# Altium PCB nRF52_UWB_MPU92_MTi_JLC.pcbdoc
Units mil, origin at the board's own origin, x right, y up, seen from the top; angles counter-clockwise.
Board outline 3419.96 x 2480 mil, 2 copper layers (Top Layer, Bottom Layer); 28 components, 34 nets, 176 pads, 73 vias.
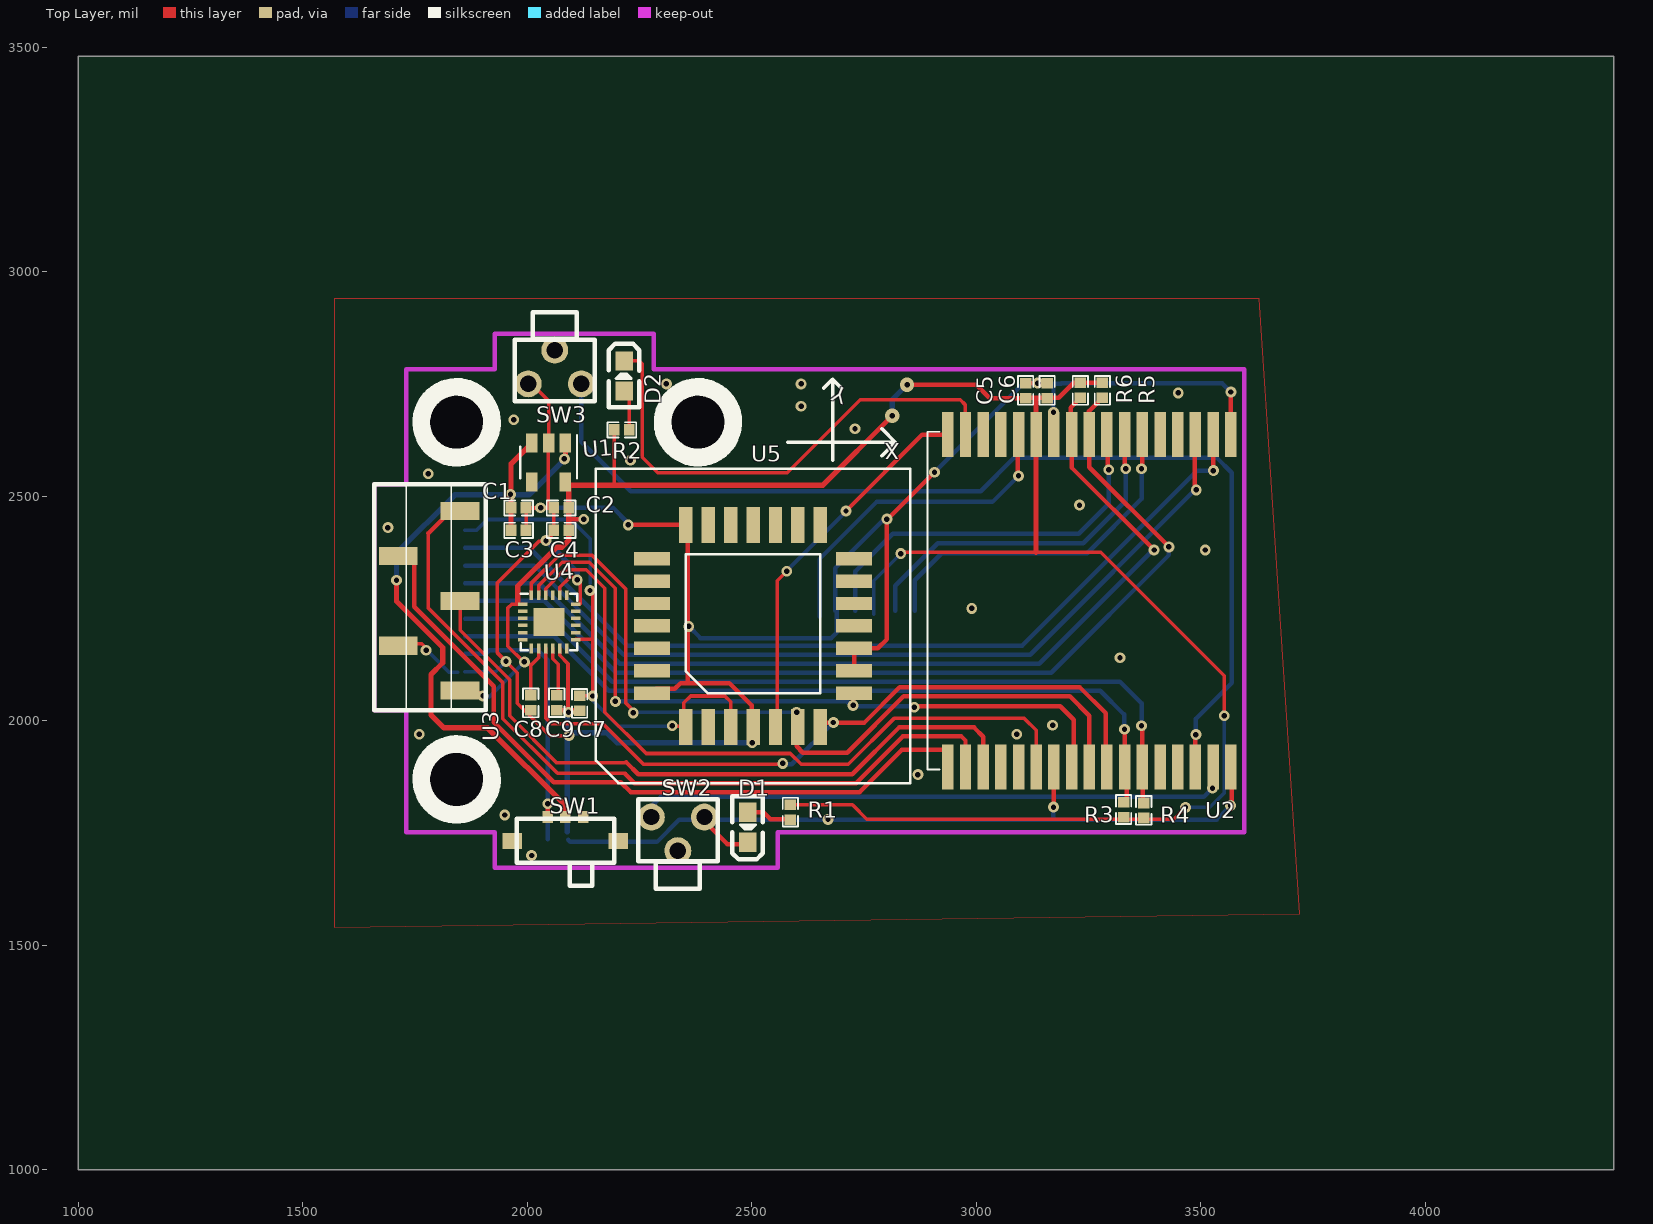
[diagram p0: Top Layer view]
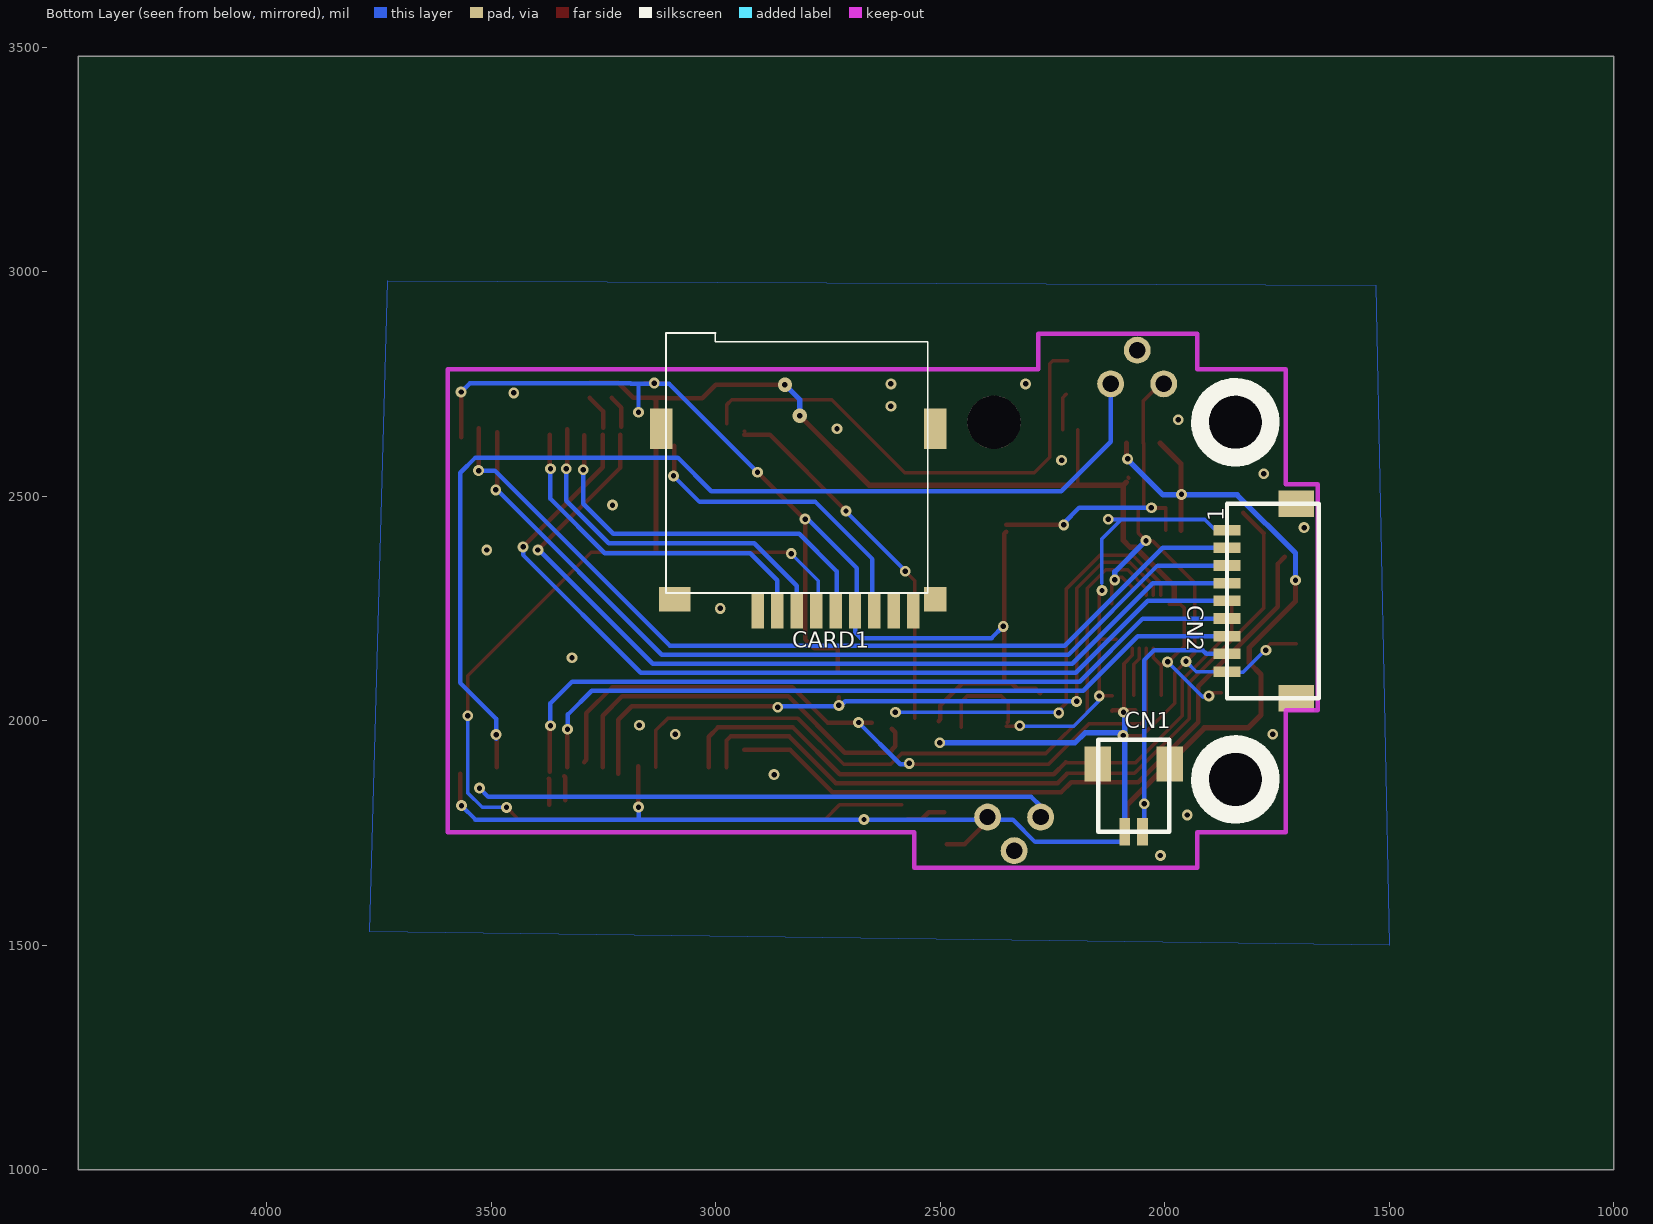
[diagram p1: Bottom Layer view, seen from below]

## Layer stack, top to bottom
Top Layer: signal copper (thickness not stored)
Dielectric: dielectric 12.6, FR-4, Dk 4.8
Bottom Layer: signal copper (thickness not stored)

## Board outline
4419.96,1000 1000,1000 1000,3480 4419.96,3480

## Components (designator, comment, footprint, x,y, rotation, side; value= is the part's Value field where it differs from the comment)
C1 "10uF" 0402 1980.82,2473.64 r180 top
C2 "10uF" 0402 2075.82,2473.64 r0 top
C3 "100nF" 0402 1980.82,2423.64 r180 top
C4 "100nF" 0402 2075.82,2423.64 r0 top
C5 "10uF" 0402 3110,2735 r270 top
C6 "100nF" 0402 3158,2735 r270 top
C7 "10nF" 0402 2117,2039 r90 top
C8 "100nF" 0402 2008,2040 r90 top
C9 "100nF" 0402 2066,2040 r270 top
CARD1 "HYC77-TF09-200" TF-015 2815.87,2447.6 r180 bottom
CN1 "A1002WV-S-2P" A1002WR-S-2P_LEO 2069.4,1828.7 r180 bottom
CN2 "A1002WR-S-9P" A1002WR-S-9P_LEO 1785.94,2266.89 r270 bottom
D1 "YELLOW" LED-0603 2490.82,1762.64 r90 top
D2 "RED" LED-0603 2215.82,2767.64 r270 top
R1 "1K" 0402 2586,1796 r270 top
R2 "200" 0402 2210.82,2647.64 r180 top
R3 "10K" 0402 3328,1802 r270 top
R4 "10K" 0402 3373,1800 r270 top
R5 "10K" 0402 3281,2735.6 r90 top
R6 "10K" 0402 3232,2735.6 r90 top
SW1 "SSAJ120100" SW-SMD-5.5X2.5 2085.15,1759.02 r0 top
SW2 "KAN4562-0501C" KAN4562-0501C 2335.5,1748 r0 top
SW3 "KAN4562-0501C" KAN4562-0501C 2061.5,2787.6 r180 top
U1 "SPX3819M5-L-3-3/TR" SOT-23-5 2048,2575 r270 top
U2 "DWM1001" DWM1001 3404.06,2266.89 r270 top
U3 "GPS_Header" GPS_HEADER_SMT 1730.83,1751.14 r90 top
U4 "MPU-9250" QFN-24-1EP_3X3MM_PITCH0.4MM 2049,2220 r0 top
U5 "MTi-1" PLCC-28 2503,2211 r0 top

## Footprints (in the part's own frame and the unit in brackets; to place one, negate y for a bottom-side part, rotate by r counter-clockwise, add the part's x,y. Pads: shape width x height; smd on the part's side, far side on the other; paste and mask are expansions set on the pad)
0402 [mm]
  rect 0.6x0.65 smd: 1(-0.424,0) 2(0.424,0)
  silkscreen extent -0.82,-0.43 0.81,0.43
A1002WR-S-2P_LEO [mm]
  rect 0.6x1.55 smd: 1(-0.502,-1.925) 2(0.498,-1.925)
  rect 1.5x2 smd: 3(-2.033,1.906) 4(2.031,1.906)
  silkscreen extent -2,-1.92 2,3.27
A1002WR-S-9P_LEO [mm]
  rect 0.6x1.55 smd: 1(-4.001,-1.923) 2(-3,-1.923) 3(-1.997,-1.926) 4(-1.001,-1.923) 5(0,-1.923) 6(1.001,-1.923) 7(1.999,-1.923) 8(3.001,-1.923) 9(4,-1.923)
  rect 1.5x2 smd: 10(-5.499,2) 11(5.5,2)
  silkscreen extent -5.5,-1.92 5.5,3.28
DWM1001 [mm]
  rect 2.54x0.65 smd: 1(-9.403,4.129) 2(-9.403,3.129) 3(-9.403,2.129) 4(-9.403,1.128) 5(-9.403,0.13) 6(-9.403,-0.871) 7(-9.403,-1.872) 8(-9.403,-2.87) 9(-9.403,-3.871) 10(-9.403,-4.872) 11(-9.403,-5.871) 12(-9.403,-6.871) 13(-9.403,-7.871) 14(-9.403,-8.872) 15(-9.403,-9.87) 16(-9.403,-10.871) 17(-9.403,-11.872) 18(9.406,-11.872) 19(9.406,-10.871) 20(9.406,-9.87) 21(9.406,-8.872) 22(9.406,-7.871) 23(9.406,-6.871) 24(9.406,-5.871) 25(9.406,-4.872) 26(9.406,-3.871) 27(9.406,-2.87) 28(9.406,-1.872) 29(9.406,-0.871) 30(9.406,0.13) 31(9.406,1.128) 32(9.406,2.129) 33(9.406,3.129) 34(9.406,4.129)
  silkscreen extent -9.56,-13.02 9.54,-12.32
GPS_HEADER_SMT [mm]
  rect 1.02x2.2 smd: 1(8.02,-3.051) 2(10.56,0.45) 3(13.1,-3.051) 4(15.64,0.45) 5(18.18,-3.051)
  round 3 hole 3 slot 3 at 90 deg unplated: ""(3,-2.85) ""(23.2,-2.85)
  silkscreen extent 1,-4.85 25.2,1.8
KAN4562-0501C [mil]
  round 60 hole 36: 0(0,-37.4) 1(-59.05,37.4) 2(59.06,37.4)
  silkscreen extent -89,-122 89,77
LED-0603 [mil]
  rect 43x39 smd: 1(33.5,0) 2(-33.5,0)
  silkscreen extent -72,-34 70,34
PLCC-28 [mil]
  rect 80x30 smd: 1(-225,0) 2(-225,-50) 3(-225,-100) 4(-225,-150) 12(225,-150) 13(225,-100) 14(225,-50) 15(225,0) 16(225,50) 17(225,100) 18(225,150) 26(-225,150) 27(-225,100) 28(-225,50)
  rect 30x80 smd: 5(-150,-225) 6(-100,-225) 7(-50,-225) 8(0,-225) 9(50,-225) 10(100,-225) 11(150,-225) 19(150,225) 20(100,225) 21(50,225) 22(0,225) 23(-50,225) 24(-100,225) 25(-150,225)
  silkscreen extent -350,-350 350,350
QFN-24-1EP_3X3MM_PITCH0.4MM [mil]
  rect 21.65x7.87 smd: 1(-59.05,39.37) 2(-59.05,23.62) 3(-59.05,7.87) 4(-59.05,-7.88) 5(-59.05,-23.63) 6(-59.05,-39.38) 13(59.05,-39.38) 14(59.05,-23.63) 15(59.05,-7.88) 16(59.05,7.87) 17(59.05,23.62) 18(59.05,39.37)
  rect 7.87x21.65 smd: 7(-39.35,-59.08) 8(-23.6,-59.08) 9(-7.9,-59.08) 10(7.9,-59.08) 11(23.6,-59.08) 12(39.4,-59.08) 19(39.4,59.08) 20(23.6,59.08) 21(7.9,59.08) 22(-7.9,59.08) 23(-23.6,59.08) 24(-39.35,59.08)
  rect 34.45x31.5 smd: 25(-17.1,-15.78) 25(-17.1,15.72) 25(17.15,-15.78) 25(17.15,15.72)
  silkscreen extent -63,-63 63,63
SOT-23-5 [mm]
  rect 1.06x0.65 smd: 1(-1.1,0.95) 2(-1.1,0) 3(-1.1,-0.95) 4(1.1,-0.95) 5(1.1,0.95)
  silkscreen extent -1.55,-1.61 0.9,1.61
SW-SMD-5.5X2.5 [mil]
  rect 23.62x27.56 smd: 1(-39.4,26.57) 2(39.4,26.57) C(0,26.57)
  rect 43.31x35.43 smd: 4(-118.15,-26.58) 5(118.15,-26.58)
  silkscreen extent -108,-127 108,23
TF-015 [mil]
  rect 27.56x78.74 smd: 1(-90.2,-202.58) 2(-46.95,-202.48) 3(-3.75,-202.58) 4(39.5,-202.58) 5(82.8,-202.58) 6(126,-202.58) 7(169.2,-202.58) 8(212.4,-202.58) 9(255.9,-202.58)
  rect 50x55 smd: 10(305,-177.43)
  rect 50x90 smd: 11(305,202.57) 12(-305,202.57)
  rect 70x55 smd: 13(-275,-177.43)
  silkscreen extent -295,-163 288,416

## Free pads (board coordinates)
  round 118.11 hole 118.1 slot 118.11 at 0 deg unplated: ""(2380.43,2664.53)

## Via types
v1: diameter 24.02, hole 12.01, Top Layer to Bottom Layer, 71 vias
v2: diameter 31.5, hole 12.01, Top Layer to Bottom Layer, 2 vias

## Nets (pads, with @x,y where several pads share a name; then routed paths per layer and width w, separated by ;. In a path a pad name is that pad's centre, name@x,y a point inside that pad or via, vN(x,y) a via of type N, cw(c..) or ccw(c..) an arc to the next point about the centre after c; other vN are vias at no path point)
BUTTON_RST: SW2.1 U2.33 | length 1290.4
  Bottom Layer w10: SW2.1@2276.49,1785.4 2276.49,1809.49 2298,1831 3507,1831 v1(3526,1850)
BUTTON_SDCARD: SW3.1 U2.32 | length 2366
  Top Layer w10: U2.32 3487.86,1967.86 v1(3489,1969)
  Bottom Layer w10: SW3.1 2120.58,2621.42 2231,2511 3010,2511 3084.88,2585.88 3535.13,2585.88 3569,2552 3569,2084 3489,2004 v1@3489,1960
CHARGE_VC: CN1.2 CN2.8 SW1.1 | length 625.4
  Top Layer w10: SW1.1 2045.75,1814.75 v1(2046,1815)
  Bottom Layer w10: CN2.8 1907.75,2148.75 1916,2157 2024,2157 2046,2135 CN1.2@2046,1736
D2_1: D2.1 R2.1 | length 82.5
  Top Layer w7.87: D2.1@2220,2727 2227.52,2719.48 R2.1
FOOT_2: CN2.4 R6.1 U2.10 | length 2119
  Top Layer w10: U2.10@3210,2654 3210,2696.9 R6.1 ; U2.10 3212.26,2563.74 v1(3396,2380)
  Bottom Layer w10: CN2.4 2027.13,2306.3 2206.43,2127 3140,2127 v1@3394,2381
FOOT_5: CN2.5 R5.1 U2.9 | length 2157
  Top Layer w10: U2.9@3251,2652 3251,2688.9 R5.1 ; U2.9 3251.66,2564.34 v1(3429,2387)
  Bottom Layer w10: CN2.5 2038.25,2266.9 2198.15,2107 3167,2107 3429,2369 v1@3429,2381
FOOT_6: CN2.6 R4.1 U2.29 | length 1802.7
  Top Layer w10: v1(3368,1989) 3370,1987 U2.29@3370,1886 ; R4.1@3371,1813 3371,1870 U2.29@3372,1871
  Bottom Layer w10: CN2.6 2049.36,2227.5 2189.86,2087 3320,2087 3368,2039 v1@3368,1983
FOOT_7: CN2.7 R3.1 U2.28 | length 1713.9
  Top Layer w10: v1(3330,1981) 3330.36,1980.64 U2.28 ; R3.1@3335,1823 3335,1874 U2.28@3337,1876
  Bottom Layer w10: CN2.7 2060.38,2188.2 2181.58,2067 3276,2067 3329,2014 v1@3329,1978
GND: C1.1 C2.1 C3.1 C4.1 C5.1 C6.1 C7.1 C8.1 C9.2 CARD1.6 CN1.1 CN2.9 D1.2 SW2.2 SW3.2 U1.2 U2.1 U2.11 U2.24 U2.34 U3.2 U4.11 U4.18 U4.20 U5.4 U5.8 U5.13 U5.14 U5.25 | length 7374.9
  Top Layer w7.87: U3.2@1707,2171 1765,2171 v1@1780,2156 ; C3.1 C1.1 C2.1 C4.1@2059.12,2431 ; SW3.2@2012,2748 2048,2712 U1.2 2047,2617.3 2047,2475 ; C4.1@2059,2431 2059,2418 2041,2400 2027,2400 1933,2306 1933,2152 1978,2107 1978,2039 2050,1967 v1(2093,1967) ; U4.11 2072.6,2145.4 2091,2127 v1@2091,2019 ; U4.20@2073,2289 2073,2297 2095,2319 2111,2319 2118,2312 U4.18@2118,2261 ; v1@2225,2437 v1@2226,2436
  Top Layer w10: C9.2 2116,2023.3 C7.1 ; v1@2225.98,2435.98 U5.25 ; U5.4 2288,2071 2329,2071 2341.78,2083.78 2450.22,2083.78 2500,2034 2500,2003 U5.8@2504,1999 ; U5.25@2353,2421 2358,2416 2358,2083.78 ; SW2.2@2402,1769 2446,1725 D1.2@2486,1725 ; U5.13 U5.14 2781,2161 2801,2181 2801,2447 v1(2907,2553) ; C5.1 C6.1 ; v1@3172,1811 3173,1812 U2.24@3173,1899 ; v1(3566,1811) 3569,1814 U2.34@3569,1882 ; U2.1@3567,2631 v1(3567,2732)
  Bottom Layer w7.87: v1@1772,2162 1826,2108 CN2.9@1845,2108 ; CN2.9 1930.4,2109.4 v1(1953,2132) ; v1@2091,2015 v1@2092,2016
  Bottom Layer w10: v1(2030,2474) 2191,2474 2225,2440 v1@2225,2437 ; CN1.1@2091,1735 2096,1730 2289,1730 2339,1780 3535,1780 v1(3566,1811) ; v1(2360,2210) 2385.91,2184.09 2677.09,2184.09 2689.87,2196.87 CARD1.6 ; CARD1.6@2686,2245.02 2686,2340 v1@2798,2452 ; v1(2907,2553) 3104,2750 3189,2750 ; 3171,1785.4 v1@3171,1807 ; v1(3172,2687) 3172,2750 ; 3189,2751.7 3547.3,2751.7 v1@3569,2730
  Bottom Layer w11.81: v1(2042,2401) 2111.41,2331.58 v1(2111.41,2313.54) ; CN1.1 2089.18,2013.18 v1@2091,2015 ; v1@2089.18,1973 2178,1973 2200,1951 v1(2501,1951)
  other v1: 2010,1700 2670,1780 1950,1790 3172.04,1807.63 2870,1880 1760,1970 3090,1970 3170,1990 2092,2019 3320,2140 1775,2157 2990,2250 3510,2380 1690,2430 2225,2436 2801,2449 3230,2480 1780,2550 2230,2580 2730,2650 1970,2670 2610,2700 3450,2730 2310,2750 2610,2750 3137,2751.7
GPS_1PPS: U2.19 U3.5 | length 1741.6
  Top Layer w7.87: 1780,2417.01 1780,2251 1945.8,2085.2 1945.8,2004.7 2067.7,1882.8 2218,1882.8
  Top Layer w10: 1780,2417 U3.5@1826,2463 ; 2218,1882 2238.92,1861.08 2732.36,1861.08 2836.28,1965 2967,1965 2976.06,1955.94 U2.19
GPS_UART_RX: U2.18 U3.4 | length 1561.7
  Top Layer w10: U3.4@1733,2365 1749,2349 1749,2254 1926,2077 1926,1996.5 2059.5,1863 2208.72,1863 2230.64,1841.08 2740.65,1841.08 2834.57,1935 U2.18@2936,1935
GPS_UART_TX: U2.20 U3.3 | length 1528.6
  Top Layer w7.87: U3.3 1850.94,2201.56 1961,2091.5 1961,2011 2066,1906 2220.18,1906
  Top Layer w10: 2221.23,1907.05 2247.2,1881.08 2724.08,1881.08 2828,1985 2995,1985 3015.46,1964.54 U2.20
LED_R: D2.2 U2.16 | length 1099.3
  Top Layer w7.87: D2.2 2249.86,2801.14 2256,2795 2256,2587 2291,2552 2579,2552 2742,2715 2964,2715 2975,2704 U2.16@2975,2661
R1_2: D1.1 R1.2 | length 92.3
  Top Layer w10: D1.1 2525.86,1796.14 2541,1781 2574,1781 R1.2@2576,1779
S$149: 
S$151: 
S$153: 
S$155: 
S$157: 
S$159: 
SDCARD_CLK: CARD1.5 U2.8 | length 867.9
  Top Layer w10: U2.8@3293,2636 3293,2561 v1(3295,2559)
  Bottom Layer w10: CARD1.5@2731,2245.02 2731,2333 2814,2416 3228,2416 3295,2483 v1(3295,2559)
SDCARD_MISO: CARD1.7 U2.13 | length 713.9
  Top Layer w10: v1@3092.16,2545.84 U2.13@3092.16,2612.09
  Bottom Layer w10: CARD1.7@2651,2232 2651,2360 2778,2487 3036,2487 v1(3094,2545)
SDCARD_MOSI: CARD1.3 U2.7 | length 807.3
  Top Layer w10: U2.7@3331,2649 3331,2563 v1(3333,2561)
  Bottom Layer w10: CARD1.3 2819.61,2300.61 2914,2395 3238,2395 3333,2490 v1(3333,2561)
SDCARD_NCS: CARD1.2 U2.6 | length 791.8
  Top Layer w10: v1(3368,2561) 3369.76,2562.76 U2.6
  Bottom Layer w10: CARD1.2 2862.81,2312.81 2923.08,2373.08 3247.08,2373.08 3368,2494 v1(3368,2561)
SPI_CLK: U2.25 U4.23 U5.12 | length 1667.7
  Top Layer w7.87: U4.23 2025.4,2300.4 2078,2353 2138,2353 2196,2295 v1@2196,2043.23
  Top Layer w10: v1(2725.83,2034) U5.12@2725.83,2052.64 ; v1@2860,2032 3187,2032 3217,2002 U2.25@3217,1882
  Bottom Layer w10: v1(2196.45,2043.07) 2711.93,2043.07 2723,2032 v1@2862,2032
  other v1: 2862,2030
SPI_MISO: U2.27 U4.9 U5.11 | length 1680.7
  Top Layer w7.87: U4.9 2041.1,2005.9 2054,1993 2169,1993 2259,1903 v1@2569,1903
  Top Layer w10: U5.11@2653,1996 2751,1996 2830,2075 3230,2075 3288,2017 3288,1913 U2.27@3293,1908
  Bottom Layer w10: v1(2569,1905) 2571,1903 2589,1903 v1(2682,1996)
SPI_MOSI: U2.26 U4.24 U5.10 | length 1822.8
  Top Layer w7.87: U4.24 2009.65,2306.65 2071.56,2368.56 2144.44,2368.56 2220,2293 2220,2039 v1@2232.5,2026.5
  Top Layer w10: U5.10@2608,1982 2600,1974 2600,1943 2614,1929 2712.5,1929 2838.5,2055 3208,2055 3251.66,2011.34 U2.26
  Bottom Layer w7.87: v1@2231,2025 2237,2019 v1(2600,2019)
  other v1: 2236.22,2017.48
SPI_NCS_MPU92: U2.23 U4.22 | length 1601
  Top Layer w7.87: U4.22 2041.1,2294.1 2082.98,2335.98 2132.01,2335.98 2173,2295 2173,2018.97 2265,1927.01 2361.33,1927 2586,1927 2610,1903 2715,1903 2817,2005 3107,2005 3133.56,1978.44 U2.23
SPI_NCS_MTI: U2.17 U5.9 | length 828.1
  Top Layer w7.87: U5.9@2557,2005 2557,2312 v1(2578,2333) ; U2.17@2935,2644 U2.17@2936,2644
  Top Layer w10: v1@2711,2468 2880.09,2637.09 U2.17
  Bottom Layer w10: v1@2573,2329 2710,2466 v1(2710,2467)
SWD_CLK: CN2.2 U2.2 | length 2012.2
  Top Layer w10: v1(3528,2557) U2.2@3528,2651
  Bottom Layer w10: CN2.2 2005,2385 2223,2167 3102,2167 3492,2557 v1(3528,2557)
SWD_DIO: CN2.3 U2.3 | length 1994
  Top Layer w10: U2.3@3486,2642 3486,2518 v1(3490,2514)
  Bottom Layer w10: CN2.3 2016.22,2345.5 2214.72,2147 3120,2147 v1@3490.41,2517.41
U4_10: C9.1 U4.10 | length 109.2
  Top Layer w7.87: U4.10 2056.9,2138.1 2069,2126 C9.1@2069,2056.7
VCC3.3: C2.2 C4.2 C5.2 C6.2 C7.2 C8.2 CARD1.4 CN2.1 R1.1 R2.2 R3.2 R4.2 R5.2 R6.2 U1.5 U2.12 U3.1 U4.1 U4.8 U4.13 U5.5 U5.7 | length 6088.8
  Top Layer w7.87: U3.1@1874,2062 1895.24,2062 v1(1901.97,2055.27) ; U4.1 1965.37,2259.37 1957,2251 1957,2166 v1@1992,2131 ; v1(1994,2131) 2000,2131 2008,2123 ; C8.2 2008,2123 ; U4.8 2025.4,2140.4 2008,2123 ; U1.5@2080,2540 U1.5@2082,2542 ; U4.13@2108.05,2181 2146,2181 ; C7.2 v1@2148,2055.7 ; v1@2143,2295 2146,2292 v1(2146,2055) ; 2194.12,2524.58 R2.2 ; v1@2324,1988 U5.5@2353,1988 ; U5.5@2351,1996 2349,1998 2349,2040 2364,2055 2440,2055 2453,2042 U5.7 ; R1.1 2724.3,1812.7 2756.53,1780.47 3439.47,1780.47 v1(3466,1807) ; v1@2828,2369 2834,2375 3277,2375 3552,2100 v1(3552,2011)
  Top Layer w10: 2092.52,2448.68 2092.63,2448.58 v1(2125.98,2448.58) ; v2(2845.98,2747.99) 3000,2748 3029.7,2718.3 C5.2 3110.7,2719 3184,2719 3217.3,2752.3 R5.2 ; 3133,2713 3139,2719
  Top Layer w11.81: 1979.02,2261.42 1979.02,2300.02 2065,2386 2077,2386 2092.52,2401.52 U1.5@2092.52,2524.58 ; U1.5 U1.5@2092.52,2524.58 ; v2(2812.98,2678.99) 2658.58,2524.58 U1.5@2092.52,2524.58 ; 3132.99,2375 3132.99,2712.99
  Bottom Layer w7.87: CN2.1 1887.4,2424.4 1911,2448 2097,2448 ; v1(1901.97,2055.27) 1911.73,2055.27 1915,2052 v1(1994,2131) ; v1(2125.98,2448.58) 2125.4,2448 2097,2448 ; 2141,2306 2141,2404 2097,2448 ; v1(2146,2055) 2146,2045 2203,1988 v1@2328,1988 ; CARD1.4@2772,2237 2772,2312 v1(2832,2372) ; v1(3466,1807) 3520,1807 3552,1839 v1(3552,2011)
  Bottom Layer w11.81: v2(2812.98,2678.99) 2813,2715.01 v2(2845.98,2747.99)
  other v1: 2323,1989 2140,2290
VCC3.7: C1.2 C3.2 SW1.C U1.1 U1.3 | length 1532.4
  Top Layer w11.81: v1(1709.02,2312.99) 1709,2266 1812,2163 1812,2129 1786,2103 1786,2013 1815,1984 1912,1984 2085.15,1810.85 SW1.C ; C3.2 1964.12,2571.82 U1.3 ; v1(2083,2583) 2085.4,2585.4 U1.1
  Bottom Layer w11.81: v1(1709.02,2312.99) 1709.02,2373.02 1839,2503 2004,2503 v1@2083,2582
  other v1: 1963.01,2503.99
pads on no net: CARD1.1 CARD1.8 CARD1.9 CARD1.10 CARD1.11 CARD1.12 CARD1.13 CN1.3 CN1.4 CN2.10 CN2.11 SW1.2 SW1.4 SW1.5 SW2.0 SW3.0 U1.4 U2.4 U2.5 U2.14 U2.15 U2.21 U2.22 U2.30 U2.31 U3. U4.2 U4.3 U4.4 U4.5 U4.6 U4.7 U4.12 U4.14 U4.15 U4.16 U4.17 U4.19 U4.21 U4.25 U5.1 U5.2 U5.3 U5.6 U5.15 U5.16 U5.17 U5.18 U5.19 U5.20 U5.21 U5.22 U5.23 U5.24 U5.26 U5.27 U5.28

## Polygon pours and split planes (outlines as drawn)
GND on Bottom Layer (solid): 1530,2970 1500,1500 3770,1530 3730,2980
GND on Top Layer (solid): 1570,2940 1570,1540 3720,1570 3630,2940

## Other copper
Top Layer:
  pour cut-out: 2310,2410 2310,2020 2700,2020 2700,2410
Bottom Layer:
  pour cut-out: 2310,2410 2310,2020 2700,2020 2700,2410

## Silkscreen, mask and mechanical layers (free items; w line width, h text height)
Top Overlay:
  lines w7.87 net S$149: 2580,2620 2820,2620
  lines w7.87 net S$151: 2790,2650 2820,2620
  lines w7.87 net S$153: 2790,2590 2820,2620
  lines w7.87 net S$155: 2680,2580 2680,2760
  lines w7.87 net S$157: 2660,2740 2680,2760
  lines w7.87 net S$159: 2680,2760 2700,2740
  lines w39.37: 2459.09,2661.04 cw(c2380.43,2664.59) 2459.17,2664.53
  text "Y" at 2716.35,2737.24 h35.43 r159
  text "X" at 2830,2617.72 h35.43 r180

## Text inside footprints (layer, text, board x,y; h text height)
CN2: Bottom Overlay "1" at 1869.13,2444.07 h35.43 r270
U3: Document "37.4" at 2482.22,1667.72 h35.43 r180; Document "26.2" at 1662.23,2542.47 h35.43 r90